# Altium PCB Layout.PcbDoc
Units mm, origin at the board's own origin, x right, y up, seen from the top; angles counter-clockwise.
Board outline 78.25 x 48.75 mm, 4 copper layers (Top Layer, Ground Layer, Power Layer, Bottom Layer), stack 1.591 mm thick; 134 components, 68 nets, 397 pads, 133 vias.
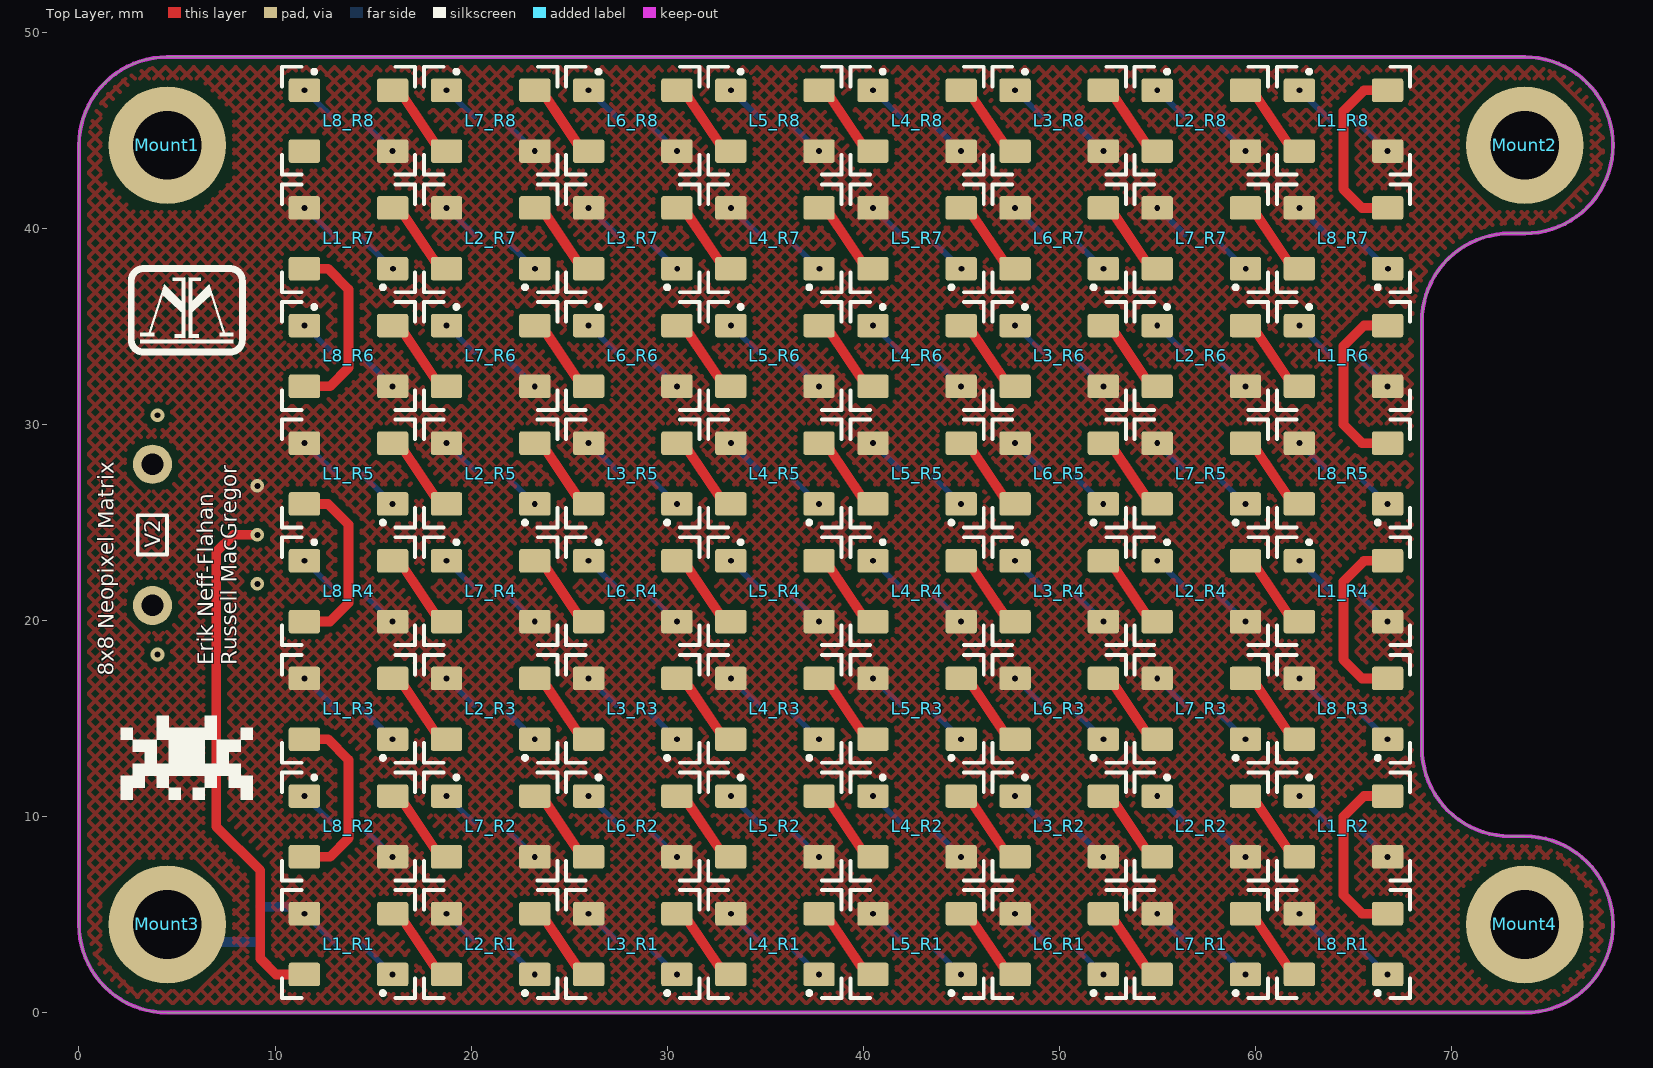
[diagram p0: Top Layer view]
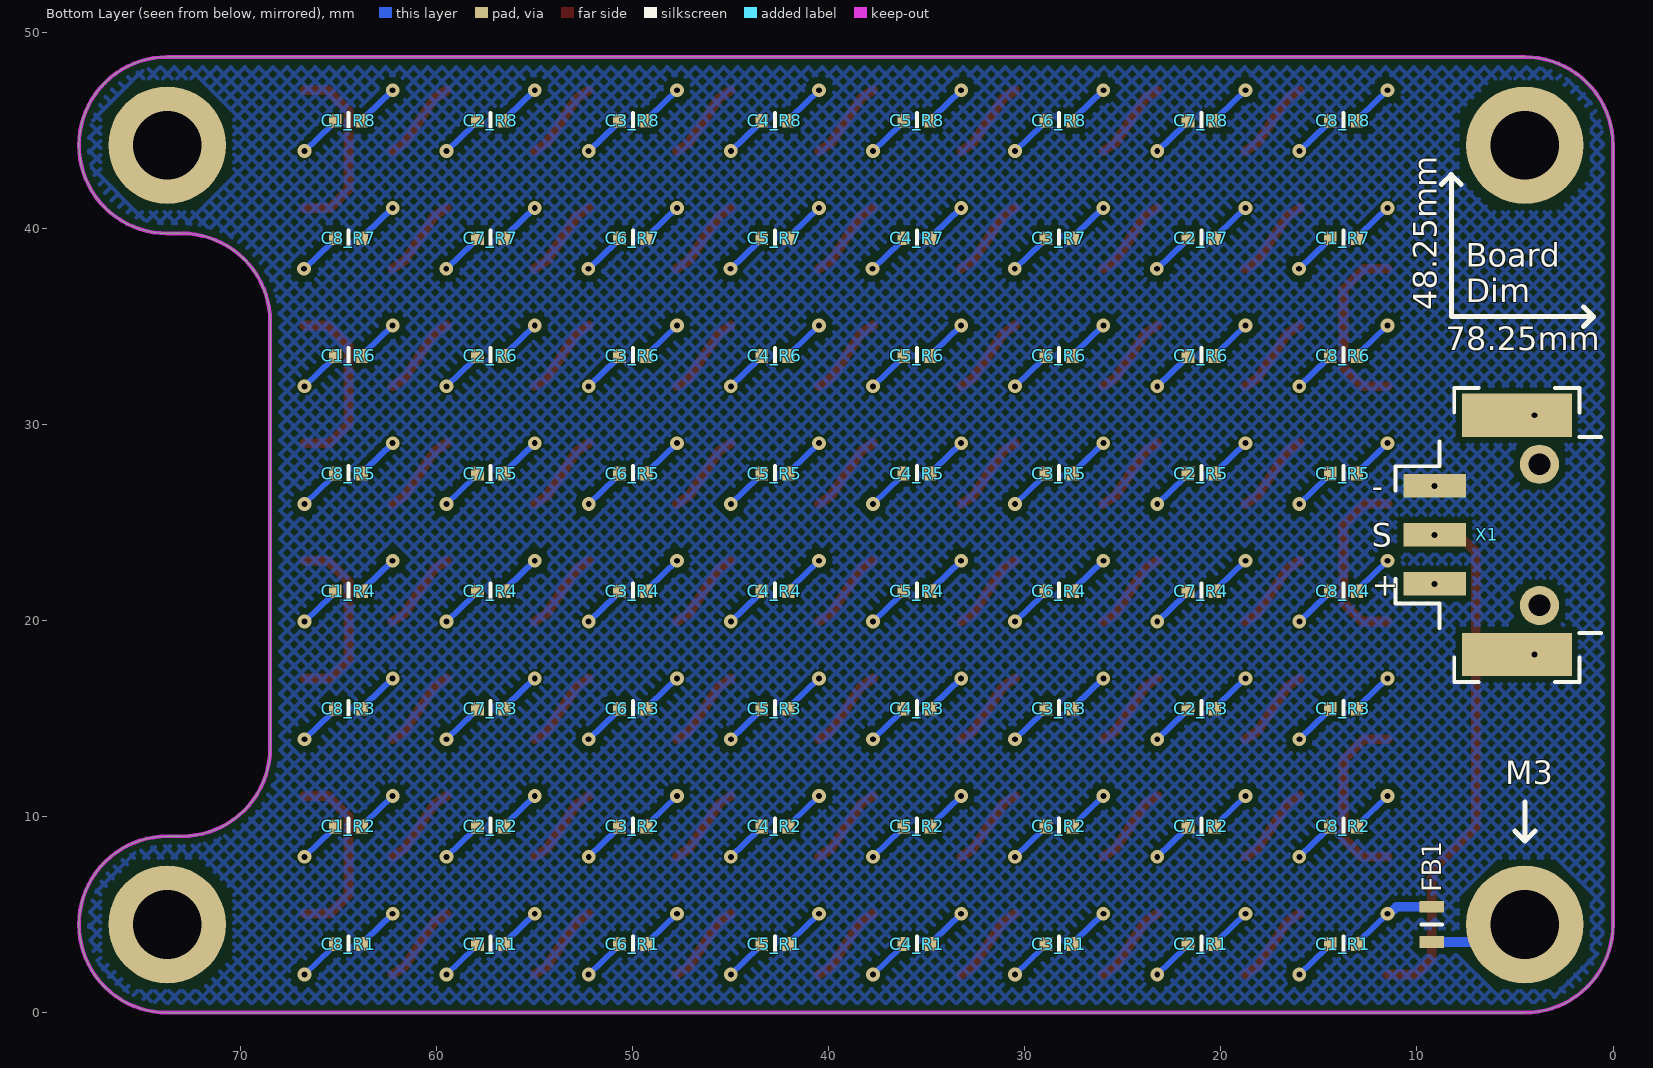
[diagram p1: Bottom Layer view, seen from below]
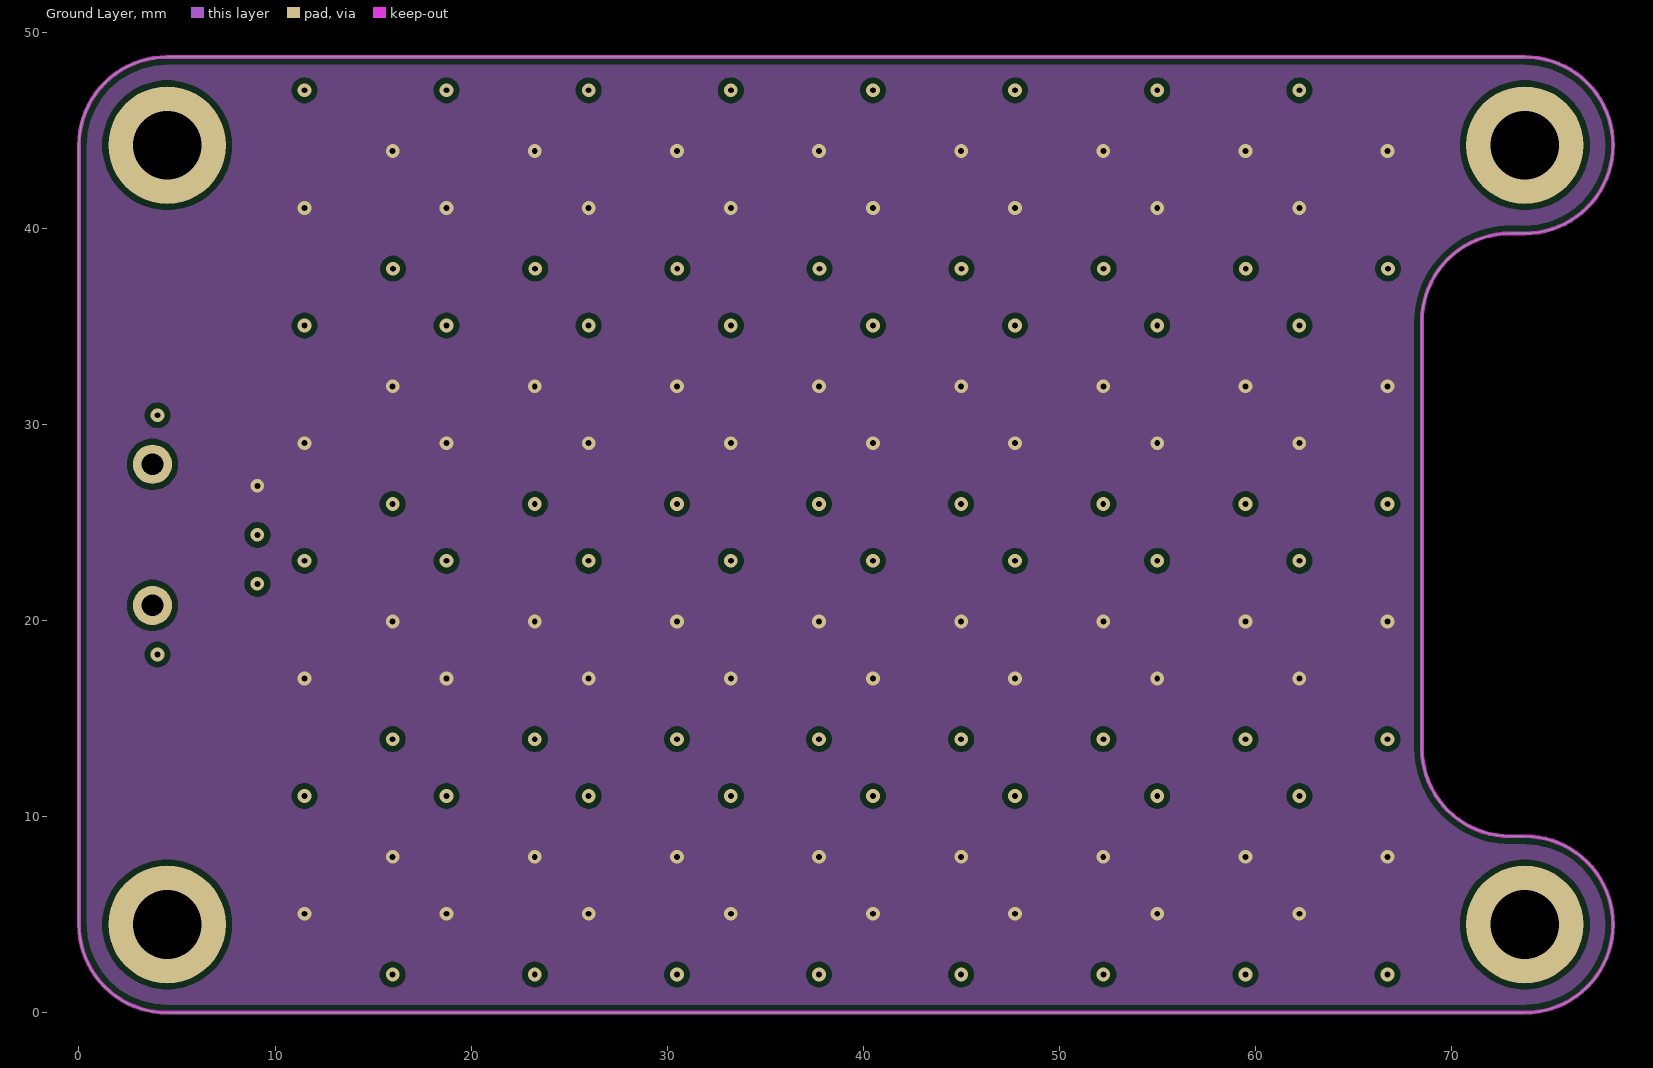
[diagram p2: Ground Layer]
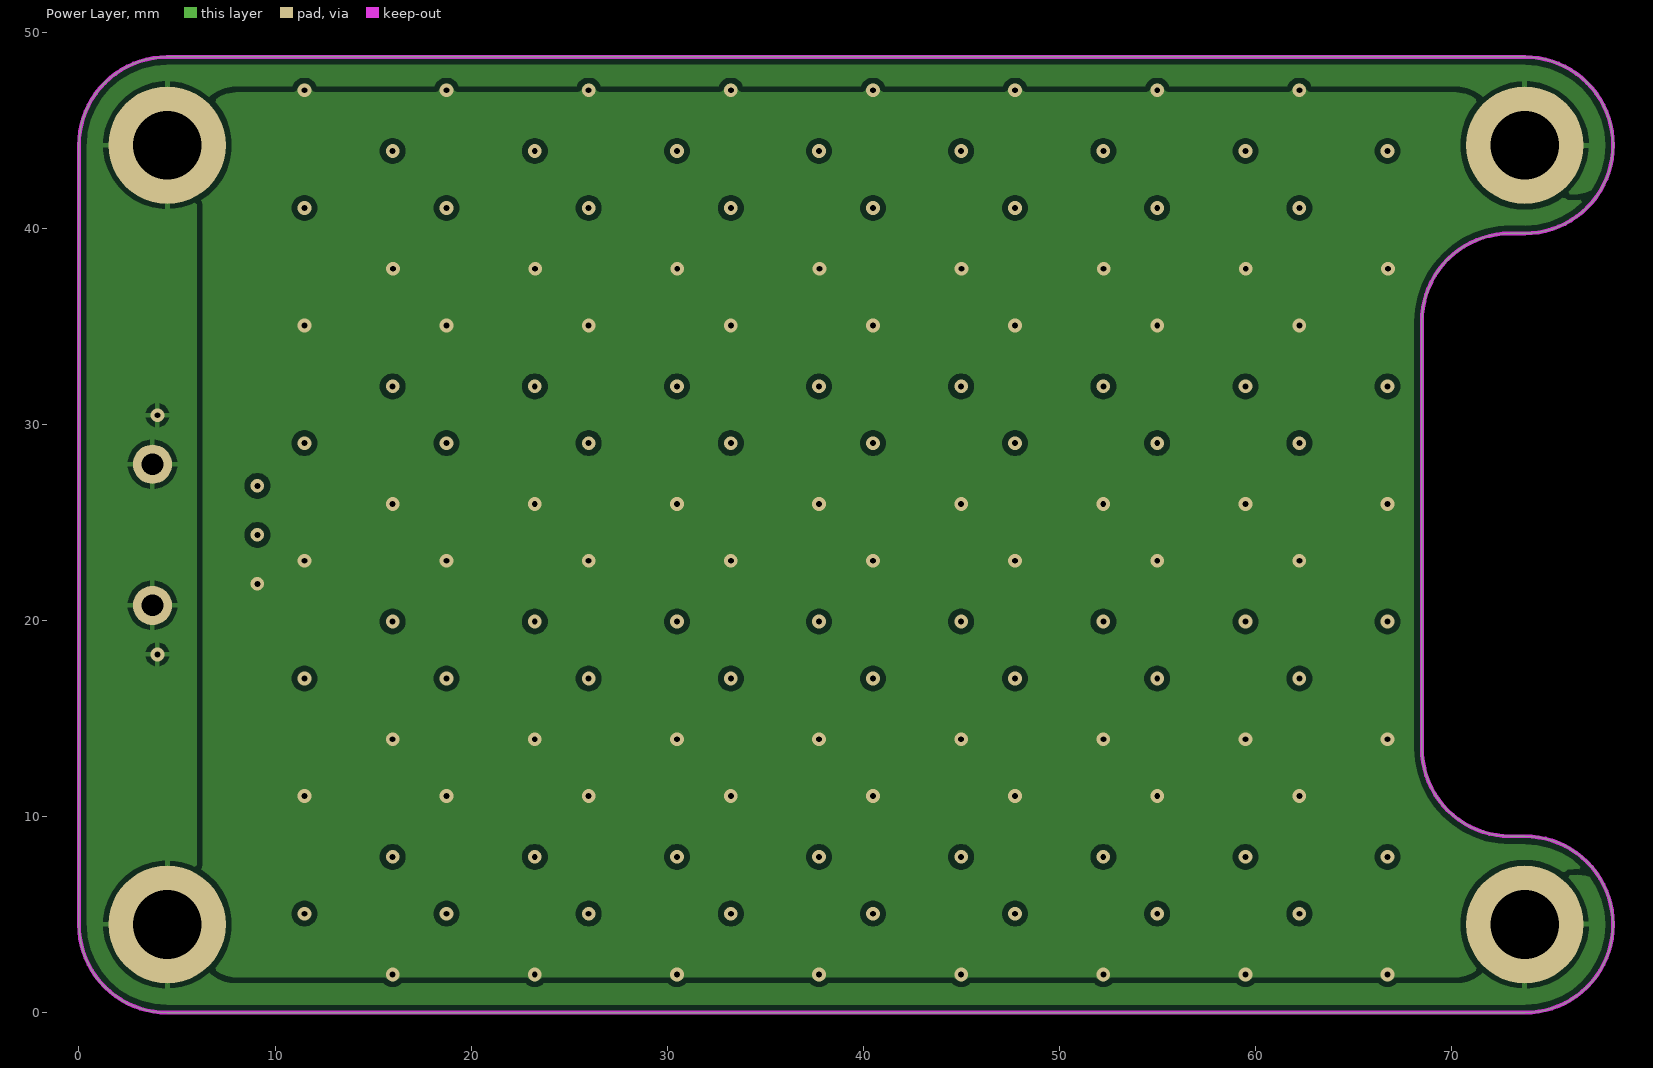
[diagram p3: Power Layer]
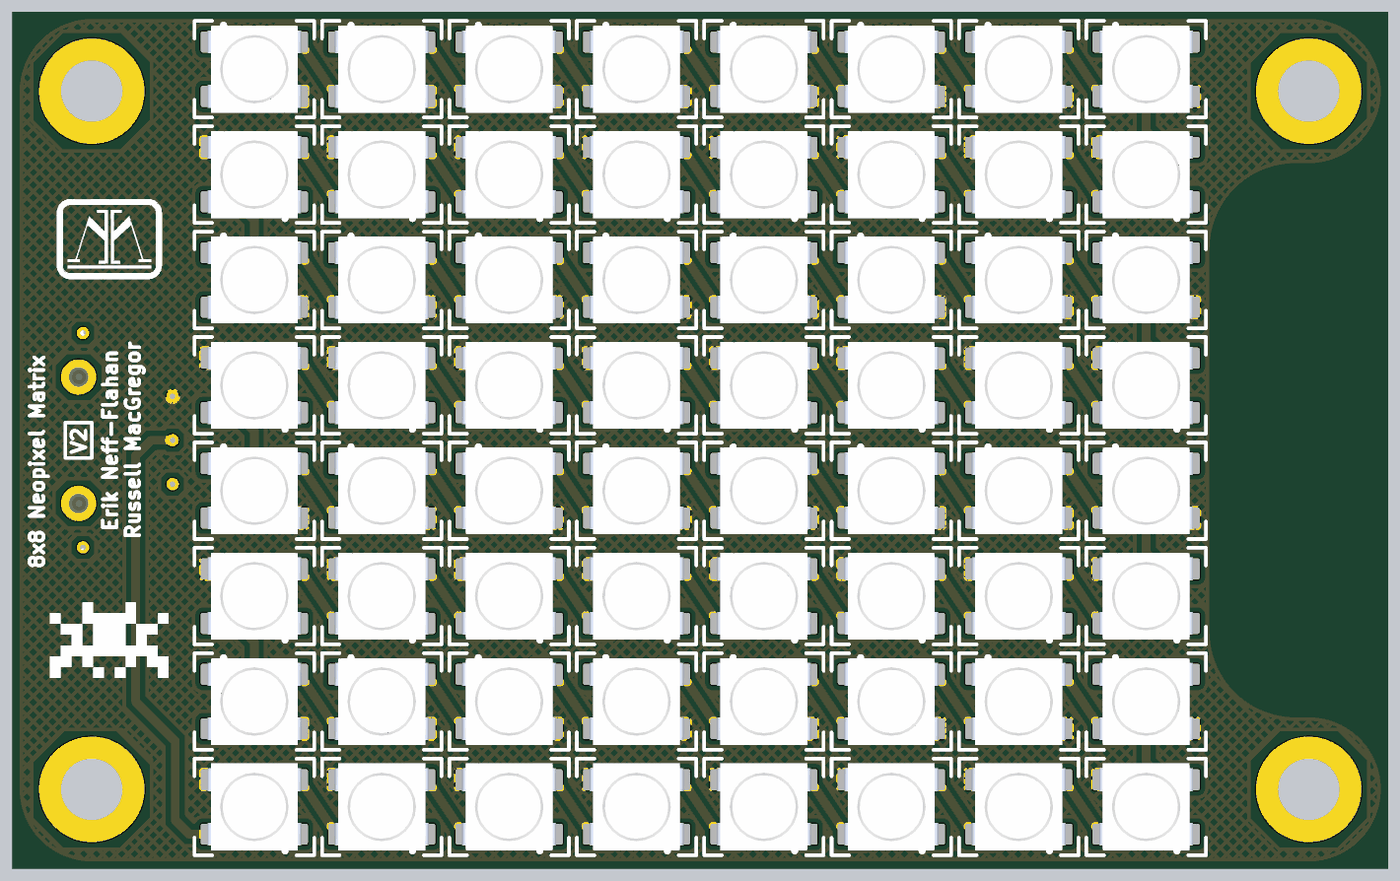
[diagram p4: 3D render of the assembled board from above, using the file's embedded part models]
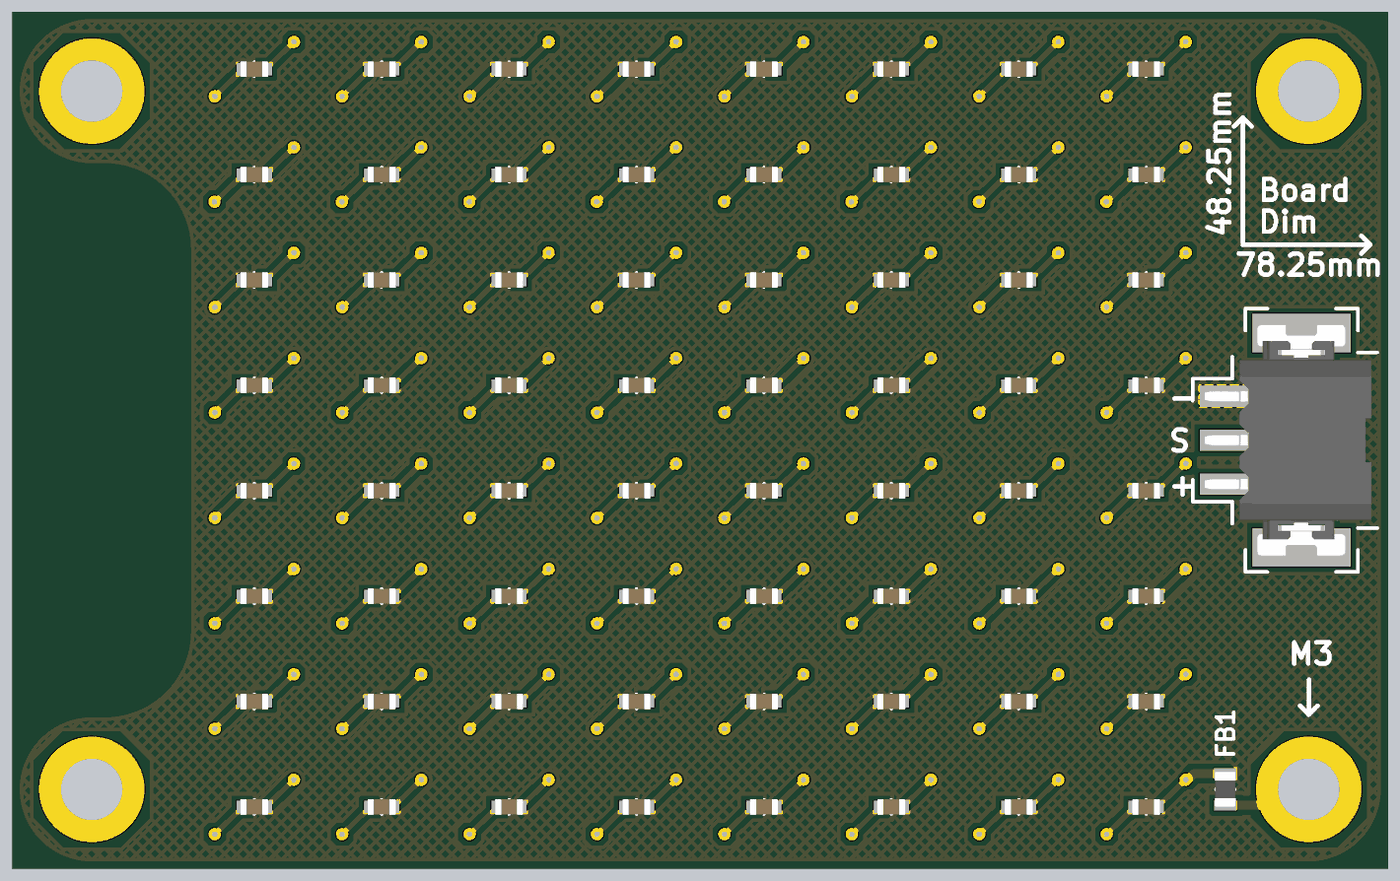
[diagram p5: 3D render of the assembled board from below, using the file's embedded part models]

## Layer stack, top to bottom
Top Solder: solder mask 0.0102, Solder Resist, Dk 3.8
Top Layer: signal copper 0.035
Dielectric 2: prepreg 0.2104, 7628*1, Dk 4.4
Ground Layer: signal copper 0.0175
Dielectric 1: dielectric 1.065, FR-4, Dk 4.8
Power Layer: signal copper 0.0175
Dielectric 3: prepreg 0.2104, 7628*1, Dk 4.4
Bottom Layer: signal copper 0.035
Bottom Solder: solder mask 0.0102, Solder Resist, Dk 3.8

## Board outline
0,4.5 0,44.25 cw(c4.5,44.25) 4.5,48.75 73.75,48.75 cw(c73.75,44.25) 78.25,44.25 cw(c73.75,44.25) 73.75,39.75 73.755,39.75 73,39.75 ccw(c73,35.25) 68.5,35.25 68.5,13.5 ccw(c73,13.5) 73,9 73.75,9 cw(c73.75,4.5) 78.25,4.5 cw(c73.75,4.5) 73.75,0 4.5,0 cw(c4.5,4.5)

## Design rules (kind name [scope] priority, off if disabled: settings)
BoardOutlineClearance [All] p1: gap=0.2 ignorepadtopadclearanceinfootprint=FALSE
Clearance "inPolygon Clearance" [InPolygon] p1: gap=0.3 ignorepadtopadclearanceinfootprint=TRUE // this rule ensures that every net within a polygon of a different net has a set clearance from the poly
Clearance "High Current Polygon Clearance" [(InPolygon AND InNetClass('High_Current_Nets'))] p2: gap=0 ignorepadtopadclearanceinfootprint=TRUE // this rule ensures that every net within a polygon of a different net has a set clearance from the poly
Clearance "Different Diff Pair" [All] p3: gap=0.2 ignorepadtopadclearanceinfootprint=TRUE
Clearance "Same Diff Pair" [All] p4: gap=0.1 ignorepadtopadclearanceinfootprint=TRUE
Clearance "Different Nets" [not InAnyDifferentialPair] p5: gap=0.3 ignorepadtopadclearanceinfootprint=TRUE except(0.1: Arc-SMDPad Arc-THPad Arc-Via Arc-Text Track-SMDPad Track-THPad Track-Via Track-Text SMDPad-Text THPad-Text Via-Text Fill-Text Poly-Text Region-Text Text-Text; 0.12: Arc-Arc Arc-Track Track-Track; 0.15: SMDPad-SMDPad SMDPad-THPad SMDPad-Via THPad-THPad THPad-Via Via-Via; 0.2: Arc-Hole Track-Hole SMDPad-Hole THPad-Hole Via-Hole Fill-Hole Poly-Hole Region-Hole Text-Hole)
Clearance "Same Net" [not InAnyDifferentialPair] p6: gap=0 ignorepadtopadclearanceinfootprint=TRUE except(0.1: THPad-Via; 0.18: Arc-Arc Arc-Track Track-Track)
ComponentClearance [All] p1: gap=0.102 collisioncheckmode=3 verticalgap=0.102 showdistances=TRUE
DiffPairsRouting "Ethernet Routing" [InDifferentialPairClass('Ethernet_Pairs')] p1: maxlimit=0.25 minlimit=0.2 mostfreqgap=0.25 toplayer_maxgap=0.2 toplayer_prefgap=0.2 toplayer_minwidth=0.25 toplayer_maxwidth=0.25 toplayer_prefwidth=0.25 midlayer1_mingap=0.25 midlayer1_minwidth=0.19 midlayer1_maxwidth=0.19 midlayer1_prefwidth=0.19 midlayer2_mingap=0.25 midlayer2_minwidth=0.19 midlayer2_maxwidth=0.19 midlayer2_prefwidth=0.19 bottomlayer_maxgap=0.2 bottomlayer_prefgap=0.2 bottomlayer_minwidth=0.25 bottomlayer_maxwidth=0.25 bottomlayer_prefwidth=0.25 impedanceprofiledriven=TRUE maxuncoupledlength=12.7
DiffPairsRouting "USB Routing" [InDifferentialPairClass('USB_Pairs')] p2: maxlimit=0.291 minlimit=0.127 mostfreqgap=0.291 toplayer_maxgap=0.127 toplayer_prefgap=0.127 toplayer_minwidth=0.23 toplayer_maxwidth=0.23 toplayer_prefwidth=0.23 midlayer1_mingap=0.291 midlayer1_minwidth=0.25 midlayer1_maxwidth=0.25 midlayer1_prefwidth=0.25 midlayer2_mingap=0.291 midlayer2_minwidth=0.25 midlayer2_maxwidth=0.25 midlayer2_prefwidth=0.25 bottomlayer_maxgap=0.127 bottomlayer_prefgap=0.127 bottomlayer_minwidth=0.23 bottomlayer_maxwidth=0.23 bottomlayer_prefwidth=0.23 maxuncoupledlength=12.7
DiffPairsRouting "CAN Routing" [InDifferentialPairClass('CAN_Pairs')] p3: maxlimit=0.907 minlimit=0.5 mostfreqgap=0.907 toplayer_maxgap=0.5 toplayer_prefgap=0.5 toplayer_minwidth=0.201 toplayer_maxwidth=0.201 toplayer_prefwidth=0.201 midlayer1_mingap=0.907 midlayer1_minwidth=0.155 midlayer1_maxwidth=0.155 midlayer1_prefwidth=0.155 midlayer2_mingap=0.907 midlayer2_minwidth=0.155 midlayer2_maxwidth=0.155 midlayer2_prefwidth=0.155 bottomlayer_maxgap=0.5 bottomlayer_prefgap=0.5 bottomlayer_minwidth=0.201 bottomlayer_maxwidth=0.201 bottomlayer_prefwidth=0.201 impedanceprofiledriven=TRUE maxuncoupledlength=12.7
Height [All] p1: minheight=0 maxheight=1816.048 prefheight=12.7
HoleSize [All] p1: absolutevalues=TRUE maxlimit=6.3 minlimit=0.3 maxpercent=80.000 minpercent=20.000
HoleToHoleClearance [All] p1: gap=0.25 allowstackedmicrovias=FALSE
MatchedLengths "XTAL Nets Matched Delays" [InNetClass('XTAL_Nets')] p1: tolerance=25.4 checknetsindiffpair=FALSE checkdiffpairvsdiffpair=TRUE checkxsignals=TRUE checkothers=TRUE usedelayunits=TRUE delaytolerance=10.000000
MatchedLengths "Diff Pair Matched Delays" [InDifferentialPairClass('Ethernet_Pairs') or InDifferentialPairClass('USB_Pairs') or InDifferentialPairClass('CAN_Pairs')] p2: tolerance=5 checknetsindiffpair=TRUE checkdiffpairvsdiffpair=FALSE checkxsignals=FALSE checkothers=FALSE usedelayunits=TRUE delaytolerance=100.000000 phasematching=TRUE phasedelaytolerance=5.000000 phasedistance=12.7
MinimumAnnularRing [All] p1: minimumring=0.2
MinimumSolderMaskSliver [All] p1: minsoldermaskwidth=0
PlaneClearance "Supply Net Clearance" [InNetClass('Supply_Nets')] p1: clearance=0.5
PlaneClearance "All Nets" [All] p2: clearance=0.3
PolygonConnect "High Current" [InNetClass('High_Current_Nets')] p1: thpad.connectstyle=Relief thpad.reliefconductorwidth=0.4 thpad.reliefentries=4 thpad.polygonreliefangle="90 Angle" thpad.airgapwidth=0.1 thpad.conductorbypadedge=TRUE thpad.mindistance=0.381 thpad.enablemindistance=FALSE smdpad.connectstyle=Direct smdpad.reliefconductorwidth=0.254 smdpad.reliefentries=4 smdpad.polygonreliefangle="90 Angle" smdpad.airgapwidth=0.254 via.connectstyle=Direct via.reliefconductorwidth=0.254 via.reliefentries=4 via.polygonreliefangle="90 Angle" via.airgapwidth=0.254
PolygonConnect "Supply Nets" [InNetClass('Supply_Nets') OR InNetClass('Supply_Net')] p2: connectstyle=Relief reliefconductorwidth=0.3 reliefentries=4 polygonreliefangle="90 Angle" conductorbypadedge=TRUE mindistance=0.381 enablemindistance=FALSE airgapwidth=0.254
PolygonConnect General [All] p3: connectstyle=Relief reliefconductorwidth=0.254 reliefentries=4 polygonreliefangle="90 Angle" airgapwidth=0.254
RoomDefinition R1 [InComponentClass('R1')] p1: confinementstyle=ConfineIn formatcopy=TRUE lockcomponents=FALSE outline 10.148,0.548 10.148,6.452 68.102,6.452 68.102,0.548
RoomDefinition R8 [InComponentClass('R8')] p2: confinementstyle=ConfineIn formatcopy=TRUE lockcomponents=FALSE outline 10.148,42.548 10.148,48.452 68.102,48.452 68.102,42.548
RoomDefinition R7 [InComponentClass('R7')] p3: confinementstyle=ConfineIn formatcopy=TRUE lockcomponents=FALSE outline 10.148,36.548 10.148,42.452 68.102,42.452 68.102,36.548
RoomDefinition R6 [InComponentClass('R6')] p4: confinementstyle=ConfineIn formatcopy=TRUE lockcomponents=FALSE outline 10.148,30.548 10.148,36.452 68.102,36.452 68.102,30.548
RoomDefinition R5 [InComponentClass('R5')] p5: confinementstyle=ConfineIn formatcopy=TRUE lockcomponents=FALSE outline 10.149,24.548 10.149,30.451 68.102,30.451 68.102,24.548
RoomDefinition R4 [InComponentClass('R4')] p6: confinementstyle=ConfineIn formatcopy=TRUE lockcomponents=FALSE outline 10.148,18.548 10.148,24.452 68.102,24.452 68.102,18.548
RoomDefinition R3 [InComponentClass('R3')] p7: confinementstyle=ConfineIn formatcopy=TRUE lockcomponents=FALSE outline 10.148,12.548 10.148,18.452 68.102,18.452 68.102,12.548
RoomDefinition R2 [InComponentClass('R2')] p8: confinementstyle=ConfineIn formatcopy=TRUE lockcomponents=FALSE outline 10.148,6.549 10.148,12.452 68.101,12.452 68.101,6.549
RoutingVias [All] p1: holewidth=0.2 width=0.35 viastyle="Through Hole" minholewidth=0.15 minwidth=0.3 maxholewidth=6.3 maxwidth=6.55
SilkToSilkClearance [All] p1: silktosilkclearance=0
SilkToSolderMaskClearance [All] p1: minsilkscreentomaskgap=0 clearancetoexposedcopper=TRUE
SolderMaskExpansion [All] p1: expansion=0.075 istentingtop=FALSE
SupplyNets "Schematic Supply Nets_1" [InNet('Earth')] p1: voltage=0.000
SupplyNets "Schematic Supply Nets" [InNet('+5V')] p2: voltage=0.000
SupplyNets "Schematic Supply Nets_3" [InNet('GND')] p3: voltage=0.000
UnRoutedNet [All] p1: checkbadconnections=TRUE
Width "nRF Width" [InNetClass('nRF Signal')] p1: maxlimit=0.379 minlimit=0.263 preferedwidth=0.379 toplayer_minwidth=0.379 midlayer1_maxwidth=0.263 midlayer1_prefwidth=0.263 midlayer2_maxwidth=0.263 midlayer2_prefwidth=0.263 bottomlayer_minwidth=0.379 minimp=50.000000 maximp=50.000000 favimp=50.000000 checkconnectedcopper=TRUE
Width [All] p2: maxlimit=100 minlimit=0.1 preferedwidth=0.2
20 further rules are at their usual default settings.

## Classes and differential pairs
net class High_Current_Nets: +5V GND
channel class "Neopixel Class": R1 R2 R3 R4 R5 R6 R7 R8
component class R8: C1_R8 C2_R8 C3_R8 C4_R8 C5_R8 C6_R8 C7_R8 C8_R8 L1_R8 L2_R8 L3_R8 L4_R8 L5_R8 L6_R8 L7_R8 L8_R8
component class R7: C1_R7 C2_R7 C3_R7 C4_R7 C5_R7 C6_R7 C7_R7 C8_R7 L1_R7 L2_R7 L3_R7 L4_R7 L5_R7 L6_R7 L7_R7 L8_R7
component class R6: C1_R6 C2_R6 C3_R6 C4_R6 C5_R6 C6_R6 C7_R6 C8_R6 L1_R6 L2_R6 L3_R6 L4_R6 L5_R6 L6_R6 L7_R6 L8_R6
component class R5: C1_R5 C2_R5 C3_R5 C4_R5 C5_R5 C6_R5 C7_R5 C8_R5 L1_R5 L2_R5 L3_R5 L4_R5 L5_R5 L6_R5 L7_R5 L8_R5
component class R4: C1_R4 C2_R4 C3_R4 C4_R4 C5_R4 C6_R4 C7_R4 C8_R4 L1_R4 L2_R4 L3_R4 L4_R4 L5_R4 L6_R4 L7_R4 L8_R4
component class R3: C1_R3 C2_R3 C3_R3 C4_R3 C5_R3 C6_R3 C7_R3 C8_R3 L1_R3 L2_R3 L3_R3 L4_R3 L5_R3 L6_R3 L7_R3 L8_R3
component class R2: C1_R2 C2_R2 C3_R2 C4_R2 C5_R2 C6_R2 C7_R2 C8_R2 L1_R2 L2_R2 L3_R2 L4_R2 L5_R2 L6_R2 L7_R2 L8_R2
component class R1: C1_R1 C2_R1 C3_R1 C4_R1 C5_R1 C6_R1 C7_R1 C8_R1 L1_R1 L2_R1 L3_R1 L4_R1 L5_R1 L6_R1 L7_R1 L8_R1
component class "Parent Sheet": FB1 Mount1 Mount2 Mount3 Mount4 X1

## Components (designator, comment, footprint, x,y, rotation, side; value= is the part's Value field where it differs from the comment)
C1_R1 "[Cap] 0603 0.1uF 10% 50V" "[Cap] SMD 0603" 13.75,3.5 r0 bottom (schematic designator C1)
C1_R2 "[Cap] 0603 0.1uF 10% 50V" "[Cap] SMD 0603" 64.5,9.5 r180 bottom (schematic designator C1)
C1_R3 "[Cap] 0603 0.1uF 10% 50V" "[Cap] SMD 0603" 13.75,15.5 r0 bottom (schematic designator C1)
C1_R4 "[Cap] 0603 0.1uF 10% 50V" "[Cap] SMD 0603" 64.5,21.5 r180 bottom (schematic designator C1)
C1_R5 "[Cap] 0603 0.1uF 10% 50V" "[Cap] SMD 0603" 13.75,27.5 r0 bottom (schematic designator C1)
C1_R6 "[Cap] 0603 0.1uF 10% 50V" "[Cap] SMD 0603" 64.5,33.5 r180 bottom (schematic designator C1)
C1_R7 "[Cap] 0603 0.1uF 10% 50V" "[Cap] SMD 0603" 13.75,39.5 r0 bottom (schematic designator C1)
C1_R8 "[Cap] 0603 0.1uF 10% 50V" "[Cap] SMD 0603" 64.5,45.5 r180 bottom (schematic designator C1)
C2_R1 "[Cap] 0603 0.1uF 10% 50V" "[Cap] SMD 0603" 21,3.5 r0 bottom (schematic designator C2)
C2_R2 "[Cap] 0603 0.1uF 10% 50V" "[Cap] SMD 0603" 57.25,9.5 r180 bottom (schematic designator C2)
C2_R3 "[Cap] 0603 0.1uF 10% 50V" "[Cap] SMD 0603" 21,15.5 r0 bottom (schematic designator C2)
C2_R4 "[Cap] 0603 0.1uF 10% 50V" "[Cap] SMD 0603" 57.25,21.5 r180 bottom (schematic designator C2)
C2_R5 "[Cap] 0603 0.1uF 10% 50V" "[Cap] SMD 0603" 21,27.5 r0 bottom (schematic designator C2)
C2_R6 "[Cap] 0603 0.1uF 10% 50V" "[Cap] SMD 0603" 57.25,33.5 r180 bottom (schematic designator C2)
C2_R7 "[Cap] 0603 0.1uF 10% 50V" "[Cap] SMD 0603" 21,39.5 r0 bottom (schematic designator C2)
C2_R8 "[Cap] 0603 0.1uF 10% 50V" "[Cap] SMD 0603" 57.25,45.5 r180 bottom (schematic designator C2)
C3_R1 "[Cap] 0603 0.1uF 10% 50V" "[Cap] SMD 0603" 28.25,3.5 r0 bottom (schematic designator C3)
C3_R2 "[Cap] 0603 0.1uF 10% 50V" "[Cap] SMD 0603" 50,9.5 r180 bottom (schematic designator C3)
C3_R3 "[Cap] 0603 0.1uF 10% 50V" "[Cap] SMD 0603" 28.25,15.5 r0 bottom (schematic designator C3)
C3_R4 "[Cap] 0603 0.1uF 10% 50V" "[Cap] SMD 0603" 50,21.5 r180 bottom (schematic designator C3)
C3_R5 "[Cap] 0603 0.1uF 10% 50V" "[Cap] SMD 0603" 28.25,27.5 r0 bottom (schematic designator C3)
C3_R6 "[Cap] 0603 0.1uF 10% 50V" "[Cap] SMD 0603" 50,33.5 r180 bottom (schematic designator C3)
C3_R7 "[Cap] 0603 0.1uF 10% 50V" "[Cap] SMD 0603" 28.25,39.5 r0 bottom (schematic designator C3)
C3_R8 "[Cap] 0603 0.1uF 10% 50V" "[Cap] SMD 0603" 50,45.5 r180 bottom (schematic designator C3)
C4_R1 "[Cap] 0603 0.1uF 10% 50V" "[Cap] SMD 0603" 35.5,3.5 r0 bottom (schematic designator C4)
C4_R2 "[Cap] 0603 0.1uF 10% 50V" "[Cap] SMD 0603" 42.75,9.5 r180 bottom (schematic designator C4)
C4_R3 "[Cap] 0603 0.1uF 10% 50V" "[Cap] SMD 0603" 35.5,15.5 r0 bottom (schematic designator C4)
C4_R4 "[Cap] 0603 0.1uF 10% 50V" "[Cap] SMD 0603" 42.75,21.5 r180 bottom (schematic designator C4)
C4_R5 "[Cap] 0603 0.1uF 10% 50V" "[Cap] SMD 0603" 35.5,27.5 r0 bottom (schematic designator C4)
C4_R6 "[Cap] 0603 0.1uF 10% 50V" "[Cap] SMD 0603" 42.75,33.5 r180 bottom (schematic designator C4)
C4_R7 "[Cap] 0603 0.1uF 10% 50V" "[Cap] SMD 0603" 35.5,39.5 r0 bottom (schematic designator C4)
C4_R8 "[Cap] 0603 0.1uF 10% 50V" "[Cap] SMD 0603" 42.75,45.5 r180 bottom (schematic designator C4)
C5_R1 "[Cap] 0603 0.1uF 10% 50V" "[Cap] SMD 0603" 42.75,3.5 r0 bottom (schematic designator C5)
C5_R2 "[Cap] 0603 0.1uF 10% 50V" "[Cap] SMD 0603" 35.5,9.5 r180 bottom (schematic designator C5)
C5_R3 "[Cap] 0603 0.1uF 10% 50V" "[Cap] SMD 0603" 42.75,15.5 r0 bottom (schematic designator C5)
C5_R4 "[Cap] 0603 0.1uF 10% 50V" "[Cap] SMD 0603" 35.5,21.5 r180 bottom (schematic designator C5)
C5_R5 "[Cap] 0603 0.1uF 10% 50V" "[Cap] SMD 0603" 42.75,27.5 r0 bottom (schematic designator C5)
C5_R6 "[Cap] 0603 0.1uF 10% 50V" "[Cap] SMD 0603" 35.5,33.5 r180 bottom (schematic designator C5)
C5_R7 "[Cap] 0603 0.1uF 10% 50V" "[Cap] SMD 0603" 42.75,39.5 r0 bottom (schematic designator C5)
C5_R8 "[Cap] 0603 0.1uF 10% 50V" "[Cap] SMD 0603" 35.5,45.5 r180 bottom (schematic designator C5)
C6_R1 "[Cap] 0603 0.1uF 10% 50V" "[Cap] SMD 0603" 50,3.5 r0 bottom (schematic designator C6)
C6_R2 "[Cap] 0603 0.1uF 10% 50V" "[Cap] SMD 0603" 28.25,9.5 r180 bottom (schematic designator C6)
C6_R3 "[Cap] 0603 0.1uF 10% 50V" "[Cap] SMD 0603" 50,15.5 r0 bottom (schematic designator C6)
C6_R4 "[Cap] 0603 0.1uF 10% 50V" "[Cap] SMD 0603" 28.25,21.5 r180 bottom (schematic designator C6)
C6_R5 "[Cap] 0603 0.1uF 10% 50V" "[Cap] SMD 0603" 50,27.5 r0 bottom (schematic designator C6)
C6_R6 "[Cap] 0603 0.1uF 10% 50V" "[Cap] SMD 0603" 28.25,33.5 r180 bottom (schematic designator C6)
C6_R7 "[Cap] 0603 0.1uF 10% 50V" "[Cap] SMD 0603" 50,39.5 r0 bottom (schematic designator C6)
C6_R8 "[Cap] 0603 0.1uF 10% 50V" "[Cap] SMD 0603" 28.25,45.5 r180 bottom (schematic designator C6)
C7_R1 "[Cap] 0603 0.1uF 10% 50V" "[Cap] SMD 0603" 57.25,3.5 r0 bottom (schematic designator C7)
C7_R2 "[Cap] 0603 0.1uF 10% 50V" "[Cap] SMD 0603" 21,9.5 r180 bottom (schematic designator C7)
C7_R3 "[Cap] 0603 0.1uF 10% 50V" "[Cap] SMD 0603" 57.25,15.5 r0 bottom (schematic designator C7)
C7_R4 "[Cap] 0603 0.1uF 10% 50V" "[Cap] SMD 0603" 21,21.5 r180 bottom (schematic designator C7)
C7_R5 "[Cap] 0603 0.1uF 10% 50V" "[Cap] SMD 0603" 57.25,27.5 r0 bottom (schematic designator C7)
C7_R6 "[Cap] 0603 0.1uF 10% 50V" "[Cap] SMD 0603" 21,33.5 r180 bottom (schematic designator C7)
C7_R7 "[Cap] 0603 0.1uF 10% 50V" "[Cap] SMD 0603" 57.25,39.5 r0 bottom (schematic designator C7)
C7_R8 "[Cap] 0603 0.1uF 10% 50V" "[Cap] SMD 0603" 21,45.5 r180 bottom (schematic designator C7)
C8_R1 "[Cap] 0603 0.1uF 10% 50V" "[Cap] SMD 0603" 64.5,3.5 r0 bottom (schematic designator C8)
C8_R2 "[Cap] 0603 0.1uF 10% 50V" "[Cap] SMD 0603" 13.75,9.5 r180 bottom (schematic designator C8)
C8_R3 "[Cap] 0603 0.1uF 10% 50V" "[Cap] SMD 0603" 64.5,15.5 r0 bottom (schematic designator C8)
C8_R4 "[Cap] 0603 0.1uF 10% 50V" "[Cap] SMD 0603" 13.75,21.5 r180 bottom (schematic designator C8)
C8_R5 "[Cap] 0603 0.1uF 10% 50V" "[Cap] SMD 0603" 64.5,27.5 r0 bottom (schematic designator C8)
C8_R6 "[Cap] 0603 0.1uF 10% 50V" "[Cap] SMD 0603" 13.75,33.5 r180 bottom (schematic designator C8)
C8_R7 "[Cap] 0603 0.1uF 10% 50V" "[Cap] SMD 0603" 64.5,39.5 r0 bottom (schematic designator C8)
C8_R8 "[Cap] 0603 0.1uF 10% 50V" "[Cap] SMD 0603" 13.75,45.5 r180 bottom (schematic designator C8)
FB1 "652-MH2029-300Y" "[Ferrite] SMD 0805" 9.25,4.5 r90 bottom
L1_R1 "[Neopixel] Single LED" "[Neopixel] Single LED" 13.75,3.5 r180 top (schematic designator L1)
L1_R2 "[Neopixel] Single LED" "[Neopixel] Single LED" 64.5,9.5 r0 top (schematic designator L1)
L1_R3 "[Neopixel] Single LED" "[Neopixel] Single LED" 13.75,15.5 r180 top (schematic designator L1)
L1_R4 "[Neopixel] Single LED" "[Neopixel] Single LED" 64.5,21.5 r0 top (schematic designator L1)
L1_R5 "[Neopixel] Single LED" "[Neopixel] Single LED" 13.75,27.5 r180 top (schematic designator L1)
L1_R6 "[Neopixel] Single LED" "[Neopixel] Single LED" 64.5,33.5 r0 top (schematic designator L1)
L1_R7 "[Neopixel] Single LED" "[Neopixel] Single LED" 13.75,39.5 r180 top (schematic designator L1)
L1_R8 "[Neopixel] Single LED" "[Neopixel] Single LED" 64.5,45.5 r0 top (schematic designator L1)
L2_R1 "[Neopixel] Single LED" "[Neopixel] Single LED" 21,3.5 r180 top (schematic designator L2)
L2_R2 "[Neopixel] Single LED" "[Neopixel] Single LED" 57.25,9.5 r0 top (schematic designator L2)
L2_R3 "[Neopixel] Single LED" "[Neopixel] Single LED" 21,15.5 r180 top (schematic designator L2)
L2_R4 "[Neopixel] Single LED" "[Neopixel] Single LED" 57.25,21.5 r0 top (schematic designator L2)
L2_R5 "[Neopixel] Single LED" "[Neopixel] Single LED" 21,27.5 r180 top (schematic designator L2)
L2_R6 "[Neopixel] Single LED" "[Neopixel] Single LED" 57.25,33.5 r0 top (schematic designator L2)
L2_R7 "[Neopixel] Single LED" "[Neopixel] Single LED" 21,39.5 r180 top (schematic designator L2)
L2_R8 "[Neopixel] Single LED" "[Neopixel] Single LED" 57.25,45.5 r0 top (schematic designator L2)
L3_R1 "[Neopixel] Single LED" "[Neopixel] Single LED" 28.25,3.5 r180 top (schematic designator L3)
L3_R2 "[Neopixel] Single LED" "[Neopixel] Single LED" 50,9.5 r0 top (schematic designator L3)
L3_R3 "[Neopixel] Single LED" "[Neopixel] Single LED" 28.25,15.5 r180 top (schematic designator L3)
L3_R4 "[Neopixel] Single LED" "[Neopixel] Single LED" 50,21.5 r0 top (schematic designator L3)
L3_R5 "[Neopixel] Single LED" "[Neopixel] Single LED" 28.25,27.5 r180 top (schematic designator L3)
L3_R6 "[Neopixel] Single LED" "[Neopixel] Single LED" 50,33.5 r0 top (schematic designator L3)
L3_R7 "[Neopixel] Single LED" "[Neopixel] Single LED" 28.25,39.5 r180 top (schematic designator L3)
L3_R8 "[Neopixel] Single LED" "[Neopixel] Single LED" 50,45.5 r0 top (schematic designator L3)
L4_R1 "[Neopixel] Single LED" "[Neopixel] Single LED" 35.5,3.5 r180 top (schematic designator L4)
L4_R2 "[Neopixel] Single LED" "[Neopixel] Single LED" 42.75,9.5 r0 top (schematic designator L4)
L4_R3 "[Neopixel] Single LED" "[Neopixel] Single LED" 35.5,15.5 r180 top (schematic designator L4)
L4_R4 "[Neopixel] Single LED" "[Neopixel] Single LED" 42.75,21.5 r0 top (schematic designator L4)
L4_R5 "[Neopixel] Single LED" "[Neopixel] Single LED" 35.5,27.5 r180 top (schematic designator L4)
L4_R6 "[Neopixel] Single LED" "[Neopixel] Single LED" 42.75,33.5 r0 top (schematic designator L4)
L4_R7 "[Neopixel] Single LED" "[Neopixel] Single LED" 35.5,39.5 r180 top (schematic designator L4)
L4_R8 "[Neopixel] Single LED" "[Neopixel] Single LED" 42.75,45.5 r0 top (schematic designator L4)
L5_R1 "[Neopixel] Single LED" "[Neopixel] Single LED" 42.75,3.5 r180 top (schematic designator L5)
L5_R2 "[Neopixel] Single LED" "[Neopixel] Single LED" 35.5,9.5 r0 top (schematic designator L5)
L5_R3 "[Neopixel] Single LED" "[Neopixel] Single LED" 42.75,15.5 r180 top (schematic designator L5)
L5_R4 "[Neopixel] Single LED" "[Neopixel] Single LED" 35.5,21.5 r0 top (schematic designator L5)
L5_R5 "[Neopixel] Single LED" "[Neopixel] Single LED" 42.75,27.5 r180 top (schematic designator L5)
L5_R6 "[Neopixel] Single LED" "[Neopixel] Single LED" 35.5,33.5 r0 top (schematic designator L5)
L5_R7 "[Neopixel] Single LED" "[Neopixel] Single LED" 42.75,39.5 r180 top (schematic designator L5)
L5_R8 "[Neopixel] Single LED" "[Neopixel] Single LED" 35.5,45.5 r0 top (schematic designator L5)
L6_R1 "[Neopixel] Single LED" "[Neopixel] Single LED" 50,3.5 r180 top (schematic designator L6)
L6_R2 "[Neopixel] Single LED" "[Neopixel] Single LED" 28.25,9.5 r0 top (schematic designator L6)
L6_R3 "[Neopixel] Single LED" "[Neopixel] Single LED" 50,15.5 r180 top (schematic designator L6)
L6_R4 "[Neopixel] Single LED" "[Neopixel] Single LED" 28.25,21.5 r0 top (schematic designator L6)
L6_R5 "[Neopixel] Single LED" "[Neopixel] Single LED" 50,27.5 r180 top (schematic designator L6)
L6_R6 "[Neopixel] Single LED" "[Neopixel] Single LED" 28.25,33.5 r0 top (schematic designator L6)
L6_R7 "[Neopixel] Single LED" "[Neopixel] Single LED" 50,39.5 r180 top (schematic designator L6)
L6_R8 "[Neopixel] Single LED" "[Neopixel] Single LED" 28.25,45.5 r0 top (schematic designator L6)
L7_R1 "[Neopixel] Single LED" "[Neopixel] Single LED" 57.25,3.5 r180 top (schematic designator L7)
L7_R2 "[Neopixel] Single LED" "[Neopixel] Single LED" 21,9.5 r0 top (schematic designator L7)
L7_R3 "[Neopixel] Single LED" "[Neopixel] Single LED" 57.25,15.5 r180 top (schematic designator L7)
L7_R4 "[Neopixel] Single LED" "[Neopixel] Single LED" 21,21.5 r0 top (schematic designator L7)
L7_R5 "[Neopixel] Single LED" "[Neopixel] Single LED" 57.25,27.5 r180 top (schematic designator L7)
L7_R6 "[Neopixel] Single LED" "[Neopixel] Single LED" 21,33.5 r0 top (schematic designator L7)
L7_R7 "[Neopixel] Single LED" "[Neopixel] Single LED" 57.25,39.5 r180 top (schematic designator L7)
L7_R8 "[Neopixel] Single LED" "[Neopixel] Single LED" 21,45.5 r0 top (schematic designator L7)
L8_R1 "[Neopixel] Single LED" "[Neopixel] Single LED" 64.5,3.5 r180 top (schematic designator L8)
L8_R2 "[Neopixel] Single LED" "[Neopixel] Single LED" 13.75,9.5 r0 top (schematic designator L8)
L8_R3 "[Neopixel] Single LED" "[Neopixel] Single LED" 64.5,15.5 r180 top (schematic designator L8)
L8_R4 "[Neopixel] Single LED" "[Neopixel] Single LED" 13.75,21.5 r0 top (schematic designator L8)
L8_R5 "[Neopixel] Single LED" "[Neopixel] Single LED" 64.5,27.5 r180 top (schematic designator L8)
L8_R6 "[Neopixel] Single LED" "[Neopixel] Single LED" 13.75,33.5 r0 top (schematic designator L8)
L8_R7 "[Neopixel] Single LED" "[Neopixel] Single LED" 64.5,39.5 r180 top (schematic designator L8)
L8_R8 "[Neopixel] Single LED" "[Neopixel] Single LED" 13.75,45.5 r0 top (schematic designator L8)
Mount1 "M3 Mount Hole" "[Mount] M3 Mount Hole" 4.5,44.25 r0 top
Mount2 "M3 Mount Hole" "[Mount] M3 Mount Hole" 73.75,44.25 r0 top
Mount3 "M3 Mount Hole" "[Mount] M3 Mount Hole" 4.5,4.5 r0 top
Mount4 "M3 Mount Hole" "[Mount] M3 Mount Hole" 73.75,4.5 r0 top
X1 "[Pheonix] 3pin 2.5mm pitch" "[Pheonix] 3pin 2.5mm pitch" 9.1,24.375 r90 bottom

## Footprints (in the part's own frame and the unit in brackets; to place one, negate y for a bottom-side part, rotate by r counter-clockwise, add the part's x,y. Pads: shape width x height; smd on the part's side, far side on the other; paste and mask are expansions set on the pad)
"[Cap] SMD 0603" [mm]
  rect 0.65x0.7 smd: 1(-0.675,0) 2(0.675,0)
  silkscreen extent 0,-0.4 0,0.4, body extent -0.8,-0.45 0.8,0.45, height 0.8
"[Ferrite] SMD 0805" [mm]
  rect 0.6x1.25 smd: 1(-0.9,0) 2(0.9,0)
  silkscreen extent 0,-0.53 0,0.53, body extent -1,-0.6 1,0.6, height 1.1
"[Mount] M3 Mount Hole" [mm]
  round 6 hole 3.5: 1(0,0)
"[Neopixel] Single LED" [mm] "WS2812B"
  rrect20% 1.6x1.2 smd: 1(-2.25,1.55) 2(-2.25,-1.55) 3(2.25,-1.55) 4(2.25,1.55)
  silkscreen extent -3.4,-2.75 3.4,2.75, body extent -2.68,-2.47 2.68,2.47, height 1.7
"[Pheonix] 3pin 2.5mm pitch" [mm] "1778777"
  rect 1.2x3.2 smd: 1(-2.5,0) 2(0,0) 3(2.5,0)
  rect 2.2x5.6 smd: MP(-6.1,-4.2) MP(6.1,-4.2)
  round 2 hole 1.1: MP(-3.6,-5.35) MP(3.6,-5.35)
  silkscreen extent -7.5,-8.5 7.5,2, body extent -6.55,-8.17 6.55,1.33, height 5

## Part data
C1_R1 C1_R2 C1_R3 C1_R4 C1_R5 C1_R6 C1_R7 C1_R8 C2_R1 C2_R2 C2_R3 C2_R4 C2_R5 C2_R6 C2_R7 C2_R8 C3_R1 C3_R2 C3_R3 C3_R4 C3_R5 C3_R6 C3_R7 C3_R8 C4_R1 C4_R2 C4_R3 C4_R4 C4_R5 C4_R6 C4_R7 C4_R8 C5_R1 C5_R2 C5_R3 C5_R4 C5_R5 C5_R6 C5_R7 C5_R8 C6_R1 C6_R2 C6_R3 C6_R4 C6_R5 C6_R6 C6_R7 C6_R8 C7_R1 C7_R2 C7_R3 C7_R4 C7_R5 C7_R6 C7_R7 C7_R8 C8_R1 C8_R2 C8_R3 C8_R4 C8_R5 C8_R6 C8_R7 C8_R8: "CL10B104KB8NNNC", Capacitance=100nF, Max Voltage=50V, Size Package=0603, Supplier Part Number 1=1276-1000-6-ND, Tolerance=10%, Supplier 1=DigiKey
FB1: library part "[Ferrite] SMD 0805 3A 30ohm", Res @ Freq="30 @ 100MHz", Size Package=0805, Supplier Part Number 1=MH2029-300YCT-ND, Supplier 1=DigiKey
L1_R1 L1_R2 L1_R3 L1_R4 L1_R5 L1_R6 L1_R7 L1_R8 L2_R1 L2_R2 L2_R3 L2_R4 L2_R5 L2_R6 L2_R7 L2_R8 L3_R1 L3_R2 L3_R3 L3_R4 L3_R5 L3_R6 L3_R7 L3_R8 L4_R1 L4_R2 L4_R3 L4_R4 L4_R5 L4_R6 L4_R7 L4_R8 L5_R1 L5_R2 L5_R3 L5_R4 L5_R5 L5_R6 L5_R7 L5_R8 L6_R1 L6_R2 L6_R3 L6_R4 L6_R5 L6_R6 L6_R7 L6_R8 L7_R1 L7_R2 L7_R3 L7_R4 L7_R5 L7_R6 L7_R7 L7_R8 L8_R1 L8_R2 L8_R3 L8_R4 L8_R5 L8_R6 L8_R7 L8_R8: "WS2812B", Supplier Part Number 1=1568-16347CT-ND, Supplier 1=DigiKey
Mount1 Mount2 Mount3 Mount4: library part "[Mount] M3 Mount Hole", "Place at least 4.5mm from board edge. Plated."
X1: "1778777", Supplier Part Number 1=277-2316-1-ND, Supplier 1=DigiKey

## Via types
v1: diameter 0.7, hole 0.3, Top Layer to Bottom Layer, 133 vias

## Nets (pads, with @x,y where several pads share a name; then routed paths per layer and width w, separated by ;. In a path a pad name is that pad's centre, name@x,y a point inside that pad or via, vN(x,y) a via of type N, cw(c..) or ccw(c..) an arc to the next point about the centre after c; other vN are vias at no path point)
+5V: C1_R1.2 C1_R2.2 C1_R3.2 C1_R4.2 C1_R5.2 C1_R6.2 C1_R7.2 C1_R8.2 C2_R1.2 C2_R2.2 C2_R3.2 C2_R4.2 C2_R5.2 C2_R6.2 C2_R7.2 C2_R8.2 C3_R1.2 C3_R2.2 C3_R3.2 C3_R4.2 C3_R5.2 C3_R6.2 C3_R7.2 C3_R8.2 C4_R1.2 C4_R2.2 C4_R3.2 C4_R4.2 C4_R5.2 C4_R6.2 C4_R7.2 C4_R8.2 C5_R1.2 C5_R2.2 C5_R3.2 C5_R4.2 C5_R5.2 C5_R6.2 C5_R7.2 C5_R8.2 C6_R1.2 C6_R2.2 C6_R3.2 C6_R4.2 C6_R5.2 C6_R6.2 C6_R7.2 C6_R8.2 C7_R1.2 C7_R2.2 C7_R3.2 C7_R4.2 C7_R5.2 C7_R6.2 C7_R7.2 C7_R8.2 C8_R1.2 C8_R2.2 C8_R3.2 C8_R4.2 C8_R5.2 C8_R6.2 C8_R7.2 C8_R8.2 L1_R1.1 L1_R2.1 L1_R3.1 L1_R4.1 L1_R5.1 L1_R6.1 L1_R7.1 L1_R8.1 L2_R1.1 L2_R2.1 L2_R3.1 L2_R4.1 L2_R5.1 L2_R6.1 L2_R7.1 L2_R8.1 L3_R1.1 L3_R2.1 L3_R3.1 L3_R4.1 L3_R5.1 L3_R6.1 L3_R7.1 L3_R8.1 L4_R1.1 L4_R2.1 L4_R3.1 L4_R4.1 L4_R5.1 L4_R6.1 L4_R7.1 L4_R8.1 L5_R1.1 L5_R2.1 L5_R3.1 L5_R4.1 L5_R5.1 L5_R6.1 L5_R7.1 L5_R8.1 L6_R1.1 L6_R2.1 L6_R3.1 L6_R4.1 L6_R5.1 L6_R6.1 L6_R7.1 L6_R8.1 L7_R1.1 L7_R2.1 L7_R3.1 L7_R4.1 L7_R5.1 L7_R6.1 L7_R7.1 L7_R8.1 L8_R1.1 L8_R2.1 L8_R3.1 L8_R4.1 L8_R5.1 L8_R6.1 L8_R7.1 L8_R8.1 X1.1 | length 126.6
  Bottom Layer w0.3: v1(11.5,11.05) C8_R2.2@12.9,9.701 ; v1(11.5,23.05) C8_R4.2@12.9,21.7 ; v1(11.5,35.05) C8_R6.2@12.9,33.7 ; v1(11.5,47.05) C8_R8.2@12.9,45.7 ; C1_R1.2 14.6,3.3 v1(16,1.95) ; C1_R3.2 14.6,15.3 v1(16,13.95) ; C1_R5.2 14.6,27.3 v1(16,25.95) ; C1_R7.2 14.6,39.3 v1@16,37.95 ; v1(18.75,11.05) C7_R2.2@20.15,9.701 ; v1(18.75,23.05) C7_R4.2@20.15,21.7 ; v1(18.75,35.05) C7_R6.2@20.15,33.7 ; v1(18.75,47.05) C7_R8.2@20.15,45.7 ; C2_R5.2@21.85,27.3 v1(23.25,25.95) ; C2_R1.2@21.85,3.3 v1(23.25,1.95) ; C2_R3.2@21.85,15.3 v1(23.25,13.95) ; C2_R7.2@21.85,39.3 v1@23.25,37.95 ; v1(26,11.05) C6_R2.2@27.4,9.701 ; v1(26,23.05) C6_R4.2@27.4,21.7 ; v1(26,35.05) C6_R6.2@27.4,33.7 ; v1(26,47.05) C6_R8.2@27.4,45.7 ; C3_R1.2@29.1,3.3 v1(30.5,1.95) ; C3_R3.2@29.1,15.3 v1(30.5,13.95) ; C3_R5.2@29.1,27.3 v1(30.5,25.95) ; C3_R7.2@29.1,39.3 v1@30.5,37.95 ; v1(33.25,11.05) C5_R2.2@34.65,9.701 ; v1(33.25,23.05) C5_R4.2@34.65,21.7 ; v1(33.25,35.05) C5_R6.2@34.65,33.7 ; v1(33.25,47.05) C5_R8.2@34.65,45.7 ; C4_R1.2@36.35,3.3 v1(37.75,1.95) ; C4_R3.2@36.35,15.3 v1(37.75,13.95) ; C4_R5.2@36.35,27.3 v1(37.75,25.95) ; C4_R7.2@36.35,39.3 v1@37.75,37.95 ; v1(40.5,11.05) C4_R2.2@41.9,9.701 ; v1(40.5,23.05) C4_R4.2@41.9,21.7 ; v1(40.5,35.05) C4_R6.2@41.9,33.7 ; v1(40.5,47.05) C4_R8.2@41.9,45.7 ; C5_R5.2@43.6,27.3 v1(45,25.95) ; C5_R1.2@43.6,3.3 v1(45,1.95) ; C5_R3.2@43.6,15.3 v1(45,13.95) ; C5_R7.2@43.6,39.3 v1@45,37.95 ; v1(47.75,11.05) C3_R2.2@49.15,9.701 ; v1(47.75,23.05) C3_R4.2@49.15,21.7 ; v1(47.75,35.05) C3_R6.2@49.15,33.7 ; v1(47.75,47.05) C3_R8.2@49.15,45.7 ; C6_R1.2@50.85,3.3 v1(52.25,1.95) ; C6_R3.2@50.85,15.3 v1(52.25,13.95) ; C6_R5.2@50.85,27.3 v1(52.25,25.95) ; C6_R7.2@50.85,39.3 v1@52.25,37.95 ; v1(55,11.05) C2_R2.2@56.4,9.701 ; v1(55,23.05) C2_R4.2@56.4,21.7 ; v1(55,35.05) C2_R6.2@56.4,33.7 ; v1(55,47.05) C2_R8.2@56.4,45.7 ; C7_R1.2@58.1,3.3 v1(59.5,1.95) ; C7_R3.2@58.1,15.3 v1(59.5,13.95) ; C7_R5.2@58.1,27.3 v1(59.5,25.95) ; C7_R7.2@58.1,39.3 v1@59.5,37.95 ; v1(62.25,11.05) 63.65,9.701 C1_R2.2 ; v1(62.25,23.05) 63.65,21.7 C1_R4.2 ; v1(62.25,35.05) 63.65,33.7 C1_R6.2 ; v1(62.25,47.05) 63.65,45.7 C1_R8.2 ; C8_R5.2@65.35,27.3 v1(66.75,25.95) ; C8_R1.2@65.35,3.3 v1(66.75,1.95) ; C8_R3.2@65.35,15.3 v1(66.75,13.95) ; C8_R7.2@65.35,39.3 v1@66.75,37.95
  other v1: 9.1,21.875 16.018,37.95 23.268,37.95 30.518,37.95 37.768,37.95 45.018,37.95 52.268,37.95 59.518,37.95 66.768,37.95
Earth: FB1.1 Mount1.1 Mount2.1 Mount3.1 Mount4.1 X1.MP | length 6.4
  Bottom Layer w0.3: Mount3.1 Mount3.1@5.4,3.6
  Bottom Layer w0.5: Mount1.1@3.6,43.35 Mount1.1 ; Mount3.1@5.4,3.6 FB1.1
  other v1: 4,18.275 4,30.475
GND: C1_R1.1 C1_R2.1 C1_R3.1 C1_R4.1 C1_R5.1 C1_R6.1 C1_R7.1 C1_R8.1 C2_R1.1 C2_R2.1 C2_R3.1 C2_R4.1 C2_R5.1 C2_R6.1 C2_R7.1 C2_R8.1 C3_R1.1 C3_R2.1 C3_R3.1 C3_R4.1 C3_R5.1 C3_R6.1 C3_R7.1 C3_R8.1 C4_R1.1 C4_R2.1 C4_R3.1 C4_R4.1 C4_R5.1 C4_R6.1 C4_R7.1 C4_R8.1 C5_R1.1 C5_R2.1 C5_R3.1 C5_R4.1 C5_R5.1 C5_R6.1 C5_R7.1 C5_R8.1 C6_R1.1 C6_R2.1 C6_R3.1 C6_R4.1 C6_R5.1 C6_R6.1 C6_R7.1 C6_R8.1 C7_R1.1 C7_R2.1 C7_R3.1 C7_R4.1 C7_R5.1 C7_R6.1 C7_R7.1 C7_R8.1 C8_R1.1 C8_R2.1 C8_R3.1 C8_R4.1 C8_R5.1 C8_R6.1 C8_R7.1 C8_R8.1 FB1.2 L1_R1.3 L1_R2.3 L1_R3.3 L1_R4.3 L1_R5.3 L1_R6.3 L1_R7.3 L1_R8.3 L2_R1.3 L2_R2.3 L2_R3.3 L2_R4.3 L2_R5.3 L2_R6.3 L2_R7.3 L2_R8.3 L3_R1.3 L3_R2.3 L3_R3.3 L3_R4.3 L3_R5.3 L3_R6.3 L3_R7.3 L3_R8.3 L4_R1.3 L4_R2.3 L4_R3.3 L4_R4.3 L4_R5.3 L4_R6.3 L4_R7.3 L4_R8.3 L5_R1.3 L5_R2.3 L5_R3.3 L5_R4.3 L5_R5.3 L5_R6.3 L5_R7.3 L5_R8.3 L6_R1.3 L6_R2.3 L6_R3.3 L6_R4.3 L6_R5.3 L6_R6.3 L6_R7.3 L6_R8.3 L7_R1.3 L7_R2.3 L7_R3.3 L7_R4.3 L7_R5.3 L7_R6.3 L7_R7.3 L7_R8.3 L8_R1.3 L8_R2.3 L8_R3.3 L8_R4.3 L8_R5.3 L8_R6.3 L8_R7.3 L8_R8.3 X1.3 | length 129
  Bottom Layer w0.3: v1@11.392,5.05 v1(11.5,5.05) 12.9,3.7 C1_R1.1 ; v1(11.5,17.05) 12.9,15.7 C1_R3.1 ; v1(11.5,29.05) 12.9,27.7 C1_R5.1 ; v1(11.5,41.05) 12.9,39.7 C1_R7.1 ; C8_R2.1@14.6,9.3 v1(16,7.95) ; C8_R4.1@14.6,21.3 v1(16,19.95) ; C8_R6.1@14.6,33.3 v1(16,31.95) ; C8_R8.1@14.6,45.3 v1(16,43.95) ; v1(18.75,29.05) C2_R5.1@20.15,27.7 ; v1(18.75,5.05) C2_R1.1@20.15,3.7 ; v1(18.75,17.05) C2_R3.1@20.15,15.7 ; v1(18.75,41.05) C2_R7.1@20.15,39.7 ; C7_R2.1@21.85,9.3 v1(23.25,7.95) ; C7_R4.1@21.85,21.3 v1(23.25,19.95) ; C7_R6.1@21.85,33.3 v1(23.25,31.95) ; C7_R8.1@21.85,45.3 v1(23.25,43.95) ; v1(26,5.05) C3_R1.1@27.4,3.7 ; v1(26,17.05) C3_R3.1@27.4,15.7 ; v1(26,29.05) C3_R5.1@27.4,27.7 ; v1(26,41.05) C3_R7.1@27.4,39.7 ; C6_R2.1@29.1,9.3 v1(30.5,7.95) ; C6_R4.1@29.1,21.3 v1(30.5,19.95) ; C6_R6.1@29.1,33.3 v1(30.5,31.95) ; C6_R8.1@29.1,45.3 v1(30.5,43.95) ; v1(33.25,5.05) C4_R1.1@34.65,3.7 ; v1(33.25,17.05) C4_R3.1@34.65,15.7 ; v1(33.25,29.05) C4_R5.1@34.65,27.7 ; v1(33.25,41.05) C4_R7.1@34.65,39.7 ; C5_R2.1@36.35,9.3 v1(37.75,7.95) ; C5_R4.1@36.35,21.3 v1(37.75,19.95) ; C5_R6.1@36.35,33.3 v1(37.75,31.95) ; C5_R8.1@36.35,45.3 v1(37.75,43.95) ; v1(40.5,29.05) C5_R5.1@41.9,27.7 ; v1(40.5,5.05) C5_R1.1@41.9,3.7 ; v1(40.5,17.05) C5_R3.1@41.9,15.7 ; v1(40.5,41.05) C5_R7.1@41.9,39.7 ; C4_R2.1@43.6,9.3 v1(45,7.95) ; C4_R4.1@43.6,21.3 v1(45,19.95) ; C4_R6.1@43.6,33.3 v1(45,31.95) ; C4_R8.1@43.6,45.3 v1(45,43.95) ; v1(47.75,5.05) C6_R1.1@49.15,3.7 ; v1(47.75,17.05) C6_R3.1@49.15,15.7 ; v1(47.75,29.05) C6_R5.1@49.15,27.7 ; v1(47.75,41.05) C6_R7.1@49.15,39.7 ; C3_R2.1@50.85,9.3 v1(52.25,7.95) ; C3_R4.1@50.85,21.3 v1(52.25,19.95) ; C3_R6.1@50.85,33.3 v1(52.25,31.95) ; C3_R8.1@50.85,45.3 v1(52.25,43.95) ; v1(55,5.05) C7_R1.1@56.4,3.7 ; v1(55,17.05) C7_R3.1@56.4,15.7 ; v1(55,29.05) C7_R5.1@56.4,27.7 ; v1(55,41.05) C7_R7.1@56.4,39.7 ; C2_R2.1@58.1,9.3 v1(59.5,7.95) ; C2_R4.1@58.1,21.3 v1(59.5,19.95) ; C2_R6.1@58.1,33.3 v1(59.5,31.95) ; C2_R8.1@58.1,45.3 v1(59.5,43.95) ; v1(62.25,29.05) C8_R5.1@63.65,27.7 ; v1(62.25,5.05) C8_R1.1@63.65,3.7 ; v1(62.25,17.05) C8_R3.1@63.65,15.7 ; v1(62.25,41.05) C8_R7.1@63.65,39.7 ; C1_R2.1 65.35,9.3 v1(66.75,7.95) ; C1_R4.1 65.35,21.3 v1(66.75,19.95) ; C1_R6.1 65.35,33.3 v1(66.75,31.95) ; C1_R8.1 65.35,45.3 v1(66.75,43.95)
  Bottom Layer w0.5: FB1.2 11.042,5.4 v1@11.392,5.05
  other v1: 9.1,26.875
NetL1_R1_2: L1_R1.2 L2_R1.4 | length 4.2
  Top Layer w0.5: L1_R1.2 16.61,4.641 18.141,2.36 L2_R1.4
NetL1_R1_4: L1_R1.4 X1.2 | length 26.7
  Top Layer w0.5: v1(9.1,24.375) 7.875,24.375 7,23.5 7,9.5 9.25,7.25 9.25,2.75 10.05,1.95 L1_R1.4
NetL1_R2_2: L1_R2.2 L2_R2.4 | length 4.2
  Top Layer w0.5: L2_R2.4 60.109,10.641 61.64,8.36 L1_R2.2
NetL1_R2_4: L1_R2.4 L8_R1.2 | length 9.3
  Top Layer w0.5: L8_R1.2 65.45,5.05 64.5,6 64.5,10 65.55,11.05 L1_R2.4
NetL1_R3_2: L1_R3.2 L2_R3.4 | length 4.2
  Top Layer w0.5: L1_R3.2 16.61,16.641 18.14,14.36 L2_R3.4
NetL1_R3_4: L1_R3.4 L8_R2.2 | length 9.3
  Top Layer w0.5: L8_R2.2 12.8,7.95 13.75,8.9 13.75,12.9 12.699,13.95 L1_R3.4
NetL1_R4_2: L1_R4.2 L2_R4.4 | length 4.2
  Top Layer w0.5: L2_R4.4 60.11,22.64 61.64,20.36 L1_R4.2
NetL1_R4_4: L1_R4.4 L8_R3.2 | length 9.3
  Top Layer w0.5: L8_R3.2@66.751,17.05 65.45,17.05 64.5,18 64.5,22 65.551,23.05 L1_R4.4
NetL1_R5_2: L1_R5.2 L2_R5.4 | length 4.2
  Top Layer w0.5: L1_R5.2 16.609,28.641 18.14,26.36 L2_R5.4
NetL1_R5_4: L1_R5.4 L8_R4.2 | length 9.3
  Top Layer w0.5: L8_R4.2@11.499,19.95 12.799,19.95 13.749,20.9 13.749,24.9 12.699,25.95 L1_R5.4
NetL1_R6_2: L1_R6.2 L2_R6.4 | length 4.2
  Top Layer w0.5: L2_R6.4 60.11,34.64 61.641,32.36 L1_R6.2
NetL1_R6_4: L1_R6.4 L8_R5.2 | length 9.3
  Top Layer w0.5: L8_R5.2@66.751,29.05 65.45,29.05 64.501,30 64.501,34 65.551,35.05 L1_R6.4
NetL1_R7_2: L1_R7.2 L2_R7.4 | length 4.2
  Top Layer w0.5: L1_R7.2 16.61,40.64 L2_R7.4@18.14,38.359 ; L2_R7.4@18.159,38.359 L2_R7.4@18.768,37.95
NetL1_R7_4: L1_R7.4 L8_R6.2 | length 9.3
  Top Layer w0.5: L8_R6.2@11.499,31.95 12.8,31.95 13.75,32.899 13.75,36.899 12.699,37.95 L1_R7.4
NetL1_R8_2: L1_R8.2 L2_R8.4 | length 4.2
  Top Layer w0.5: L2_R8.4 60.11,46.64 61.641,44.36 L1_R8.2
NetL1_R8_4: L1_R8.4 L8_R7.2 | length 9.3
  Top Layer w0.5: L8_R7.2 65.45,41.05 64.501,42 64.501,46 65.551,47.05 L1_R8.4
NetL2_R1_2: L2_R1.2 L3_R1.4 | length 4.2
  Top Layer w0.5: L2_R1.2 23.86,4.641 25.391,2.36 L3_R1.4
NetL2_R2_2: L2_R2.2 L3_R2.4 | length 4.2
  Top Layer w0.5: L3_R2.4 52.859,10.641 54.39,8.36 L2_R2.2
NetL2_R3_2: L2_R3.2 L3_R3.4 | length 4.2
  Top Layer w0.5: L2_R3.2 23.86,16.641 25.39,14.36 L3_R3.4
NetL2_R4_2: L2_R4.2 L3_R4.4 | length 4.2
  Top Layer w0.5: L3_R4.4 52.86,22.64 54.391,20.36 L2_R4.2
NetL2_R5_2: L2_R5.2 L3_R5.4 | length 4.2
  Top Layer w0.5: L2_R5.2 23.859,28.641 25.39,26.36 L3_R5.4
NetL2_R6_2: L2_R6.2 L3_R6.4 | length 4.2
  Top Layer w0.5: L3_R6.4 52.86,34.64 54.391,32.36 L2_R6.2
NetL2_R7_2: L2_R7.2 L3_R7.4 | length 4.2
  Top Layer w0.5: L2_R7.2 23.86,40.64 L3_R7.4@25.39,38.359 ; L3_R7.4@25.408,38.359 L3_R7.4@26.018,37.95
NetL2_R8_2: L2_R8.2 L3_R8.4 | length 4.2
  Top Layer w0.5: L3_R8.4 52.86,46.64 54.391,44.36 L2_R8.2
NetL3_R1_2: L3_R1.2 L4_R1.4 | length 4.2
  Top Layer w0.5: L3_R1.2 31.11,4.641 32.641,2.36 L4_R1.4
NetL3_R2_2: L3_R2.2 L4_R2.4 | length 4.2
  Top Layer w0.5: L4_R2.4 45.609,10.641 47.14,8.36 L3_R2.2
NetL3_R3_2: L3_R3.2 L4_R3.4 | length 4.2
  Top Layer w0.5: L3_R3.2 31.11,16.641 32.64,14.36 L4_R3.4
NetL3_R4_2: L3_R4.2 L4_R4.4 | length 4.2
  Top Layer w0.5: L4_R4.4 45.61,22.64 47.141,20.36 L3_R4.2
NetL3_R5_2: L3_R5.2 L4_R5.4 | length 4.2
  Top Layer w0.5: L3_R5.2 31.109,28.641 32.64,26.36 L4_R5.4
NetL3_R6_2: L3_R6.2 L4_R6.4 | length 4.2
  Top Layer w0.5: L4_R6.4 45.61,34.64 47.141,32.36 L3_R6.2
NetL3_R7_2: L3_R7.2 L4_R7.4 | length 4.2
  Top Layer w0.5: L3_R7.2 31.11,40.64 L4_R7.4@32.64,38.359 ; L4_R7.4@32.658,38.359 L4_R7.4@33.268,37.95
NetL3_R8_2: L3_R8.2 L4_R8.4 | length 4.2
  Top Layer w0.5: L4_R8.4 45.61,46.64 47.141,44.36 L3_R8.2
NetL4_R1_2: L4_R1.2 L5_R1.4 | length 4.2
  Top Layer w0.5: L4_R1.2 38.36,4.641 39.891,2.36 L5_R1.4
NetL4_R2_2: L4_R2.2 L5_R2.4 | length 4.2
  Top Layer w0.5: L5_R2.4 38.359,10.641 39.89,8.36 L4_R2.2
NetL4_R3_2: L4_R3.2 L5_R3.4 | length 4.2
  Top Layer w0.5: L4_R3.2 38.36,16.641 39.89,14.36 L5_R3.4
NetL4_R4_2: L4_R4.2 L5_R4.4 | length 4.2
  Top Layer w0.5: L5_R4.4 38.36,22.64 39.89,20.36 L4_R4.2
NetL4_R5_2: L4_R5.2 L5_R5.4 | length 4.2
  Top Layer w0.5: L4_R5.2 38.359,28.641 39.89,26.36 L5_R5.4
NetL4_R6_2: L4_R6.2 L5_R6.4 | length 4.2
  Top Layer w0.5: L5_R6.4 38.36,34.64 39.891,32.36 L4_R6.2
NetL4_R7_2: L4_R7.2 L5_R7.4 | length 4.2
  Top Layer w0.5: L4_R7.2 38.36,40.64 L5_R7.4@39.89,38.359 ; L5_R7.4@39.909,38.359 L5_R7.4@40.518,37.95
NetL4_R8_2: L4_R8.2 L5_R8.4 | length 4.2
  Top Layer w0.5: L5_R8.4 38.36,46.64 39.891,44.36 L4_R8.2
NetL5_R1_2: L5_R1.2 L6_R1.4 | length 4.2
  Top Layer w0.5: L5_R1.2 45.61,4.641 47.141,2.36 L6_R1.4
NetL5_R2_2: L5_R2.2 L6_R2.4 | length 4.2
  Top Layer w0.5: L6_R2.4 31.109,10.641 32.64,8.36 L5_R2.2
NetL5_R3_2: L5_R3.2 L6_R3.4 | length 4.2
  Top Layer w0.5: L5_R3.2 45.609,16.641 47.14,14.36 L6_R3.4
NetL5_R4_2: L5_R4.2 L6_R4.4 | length 4.2
  Top Layer w0.5: L6_R4.4 31.11,22.64 32.641,20.36 L5_R4.2
NetL5_R5_2: L5_R5.2 L6_R5.4 | length 4.2
  Top Layer w0.5: L5_R5.2 45.609,28.641 47.14,26.36 L6_R5.4
NetL5_R6_2: L5_R6.2 L6_R6.4 | length 4.2
  Top Layer w0.5: L6_R6.4 31.11,34.64 32.641,32.36 L5_R6.2
NetL5_R7_2: L5_R7.2 L6_R7.4 | length 4.2
  Top Layer w0.5: L5_R7.2 45.609,40.64 L6_R7.4@47.14,38.359 ; L6_R7.4@47.158,38.359 L6_R7.4@47.768,37.95
NetL5_R8_2: L5_R8.2 L6_R8.4 | length 4.2
  Top Layer w0.5: L6_R8.4 31.11,46.64 32.641,44.36 L5_R8.2
NetL6_R1_2: L6_R1.2 L7_R1.4 | length 4.2
  Top Layer w0.5: L6_R1.2 52.86,4.641 54.391,2.36 L7_R1.4
NetL6_R2_2: L6_R2.2 L7_R2.4 | length 4.2
  Top Layer w0.5: L7_R2.4 23.859,10.641 25.39,8.36 L6_R2.2
NetL6_R3_2: L6_R3.2 L7_R3.4 | length 4.2
  Top Layer w0.5: L6_R3.2 52.86,16.641 54.39,14.36 L7_R3.4
NetL6_R4_2: L6_R4.2 L7_R4.4 | length 4.2
  Top Layer w0.5: L7_R4.4 23.86,22.64 25.391,20.36 L6_R4.2
NetL6_R5_2: L6_R5.2 L7_R5.4 | length 4.2
  Top Layer w0.5: L6_R5.2 52.859,28.641 54.39,26.36 L7_R5.4
NetL6_R6_2: L6_R6.2 L7_R6.4 | length 4.2
  Top Layer w0.5: L7_R6.4 23.86,34.64 25.391,32.36 L6_R6.2
NetL6_R7_2: L6_R7.2 L7_R7.4 | length 4.2
  Top Layer w0.5: L6_R7.2 52.86,40.64 L7_R7.4@54.39,38.359 ; L7_R7.4@54.408,38.359 L7_R7.4@55.018,37.95
NetL6_R8_2: L6_R8.2 L7_R8.4 | length 4.2
  Top Layer w0.5: L7_R8.4 23.86,46.64 25.391,44.36 L6_R8.2
NetL7_R1_2: L7_R1.2 L8_R1.4 | length 4.2
  Top Layer w0.5: L7_R1.2 60.11,4.641 61.641,2.36 L8_R1.4
NetL7_R2_2: L7_R2.2 L8_R2.4 | length 4.2
  Top Layer w0.5: L8_R2.4 16.609,10.641 18.14,8.36 L7_R2.2
NetL7_R3_2: L7_R3.2 L8_R3.4 | length 4.2
  Top Layer w0.5: L7_R3.2 60.11,16.641 61.64,14.36 L8_R3.4
NetL7_R4_2: L7_R4.2 L8_R4.4 | length 4.2
  Top Layer w0.5: L8_R4.4 16.61,22.64 18.14,20.36 L7_R4.2
NetL7_R5_2: L7_R5.2 L8_R5.4 | length 4.2
  Top Layer w0.5: L7_R5.2 60.109,28.641 61.64,26.36 L8_R5.4
NetL7_R6_2: L7_R6.2 L8_R6.4 | length 4.2
  Top Layer w0.5: L8_R6.4 16.61,34.64 18.141,32.36 L7_R6.2
NetL7_R7_2: L7_R7.2 L8_R7.4 | length 4.2
  Top Layer w0.5: L7_R7.2 60.11,40.64 L8_R7.4@61.64,38.359 ; L8_R7.4@61.658,38.359 L8_R7.4@62.268,37.95
NetL7_R8_2: L7_R8.2 L8_R8.4 | length 4.2
  Top Layer w0.5: L8_R8.4 16.61,46.64 18.141,44.36 L7_R8.2
NetL8_R8_2: L8_R8.2

## Polygon pours and split planes (outlines as drawn)
GND on Ground Layer "GND Poly" (solid, remove dead copper, pour order 0): 0,0 0,48.75 78.25,48.75 78.25,0
Earth on Power Layer "Earth Poly" (solid, remove dead copper, pour order 3): 78.25,43.75 78.25,48.75 0,48.75 0,0 78.25,0 78.25,5 ccw(c76.5,5.25) 76.25,7 74.25,7 ccw(c74.25,5) 72.25,5 72.25,3.5 cw(c70.25,3.5) 70.25,1.5 8,1.5 cw(c8,3.5) 6,3.5 6,45.25 cw(c8,45.25) 8,47.25 70.25,47.25 cw(c70.25,45.25) 72.25,45.25 72.25,43.75 ccw(c74.25,43.75) 74.25,41.75 76.25,41.75 ccw(c76.25,43.75)
+5V on Power Layer "+5V Power Poly" (solid, remove dead copper, pour order 7): 0,0 78.25,0 78.25,48.75 0,48.75
GND on Top Layer "Top GND Poly" (hatched 45Degree grid 0.508 track 0.203, remove dead copper, pour order 4): 0,0 0,48.75 78.25,48.75 78.25,0
GND on Bottom Layer "Bottom GND Poly" (hatched 45Degree grid 0.508 track 0.203, remove dead copper, pour order 6): 0,0 0,48.75 78.25,48.75 78.25,0

## Keep-outs
Keep-Out Layer:
  lines w0.2: 73.75,39.75 ccw(c73.75,44.25) 78.25,44.25 ccw(c73.75,44.25) 73.75,48.75 4.5,48.75 ccw(c4.5,44.25) 0,44.25 0,4.5 ccw(c4.5,4.5) 4.5,0 73.75,0 ccw(c73.75,4.5) 78.25,4.5 ccw(c73.75,4.5) 73.75,9 73,9 cw(c73,13.5) 68.5,13.5 68.5,35.25 cw(c73,35.25) 73,39.75 73.755,39.75

## Silkscreen, mask and mechanical layers (free items; w line width, h text height)
Top Overlay:
  drawing of 13 lines, arcs and shapes, not listed
  text "V2" at 4.15,23.709 h0.8 r90
  text "Erik Neff-Flahan / Russell MacGregor" at 8.046,17.71 h0.8 r90
  text "8x8 Neopixel Matrix" at 1.767,17.177 h0.8 r90
Bottom Overlay:
  lines w0.254: 1,35.508 1.508,35 ; 1.508,36.008 1,35.5 8.25,35.5 8.25,42.75 8.758,42.242 ; 3.992,9.258 4.5,8.75 ; 4.492,10.75 4.492,8.75 5,9.258 ; 7.75,42.242 8.258,42.75
  text "Board" at 7.5,38.05 h1.2
  text "Dim" at 7.5,36.25 h1.2
  text "48.25mm" at 9,35.826 h1.2 r270
  text "78.25mm" at 8.524,33.8 h1.2
  text "-" at 12.3,26.275 h1.2
  text "S" at 12.3,23.775 h1.2
  text "+" at 12.3,21.275 h1.2
  text "M3" at 5.492,11.65 h1.2
Poly Planning:
  lines w0.1: 6,3.5 ccw(c8,3.5) 8,1.5 ; 6,45.25 cw(c8,45.25) 8,47.25 ; 70.25,1.5 ccw(c70.25,3.5) 72.25,3.5 ; 70.25,47.25 cw(c70.25,45.25) 72.25,45.25 ; 72.25,5 cw(c74.25,5) 74.25,7 ; 72.25,43.75 ccw(c74.25,43.75) 74.25,41.75 ; 76.25,7 cw(c76.25,5) 78.25,5 ; 76.25,41.75 ccw(c76.25,43.75) 78.25,43.75 ; 0,0 78.25,0 78.25,7 72.25,7 72.25,1.5 6,1.5 6,47.25 72.25,47.25 72.25,41.75 78.25,41.75 78.25,48.75 0,48.75 0,0